# EAGLE board schematics (EAGLE 7.5.0)
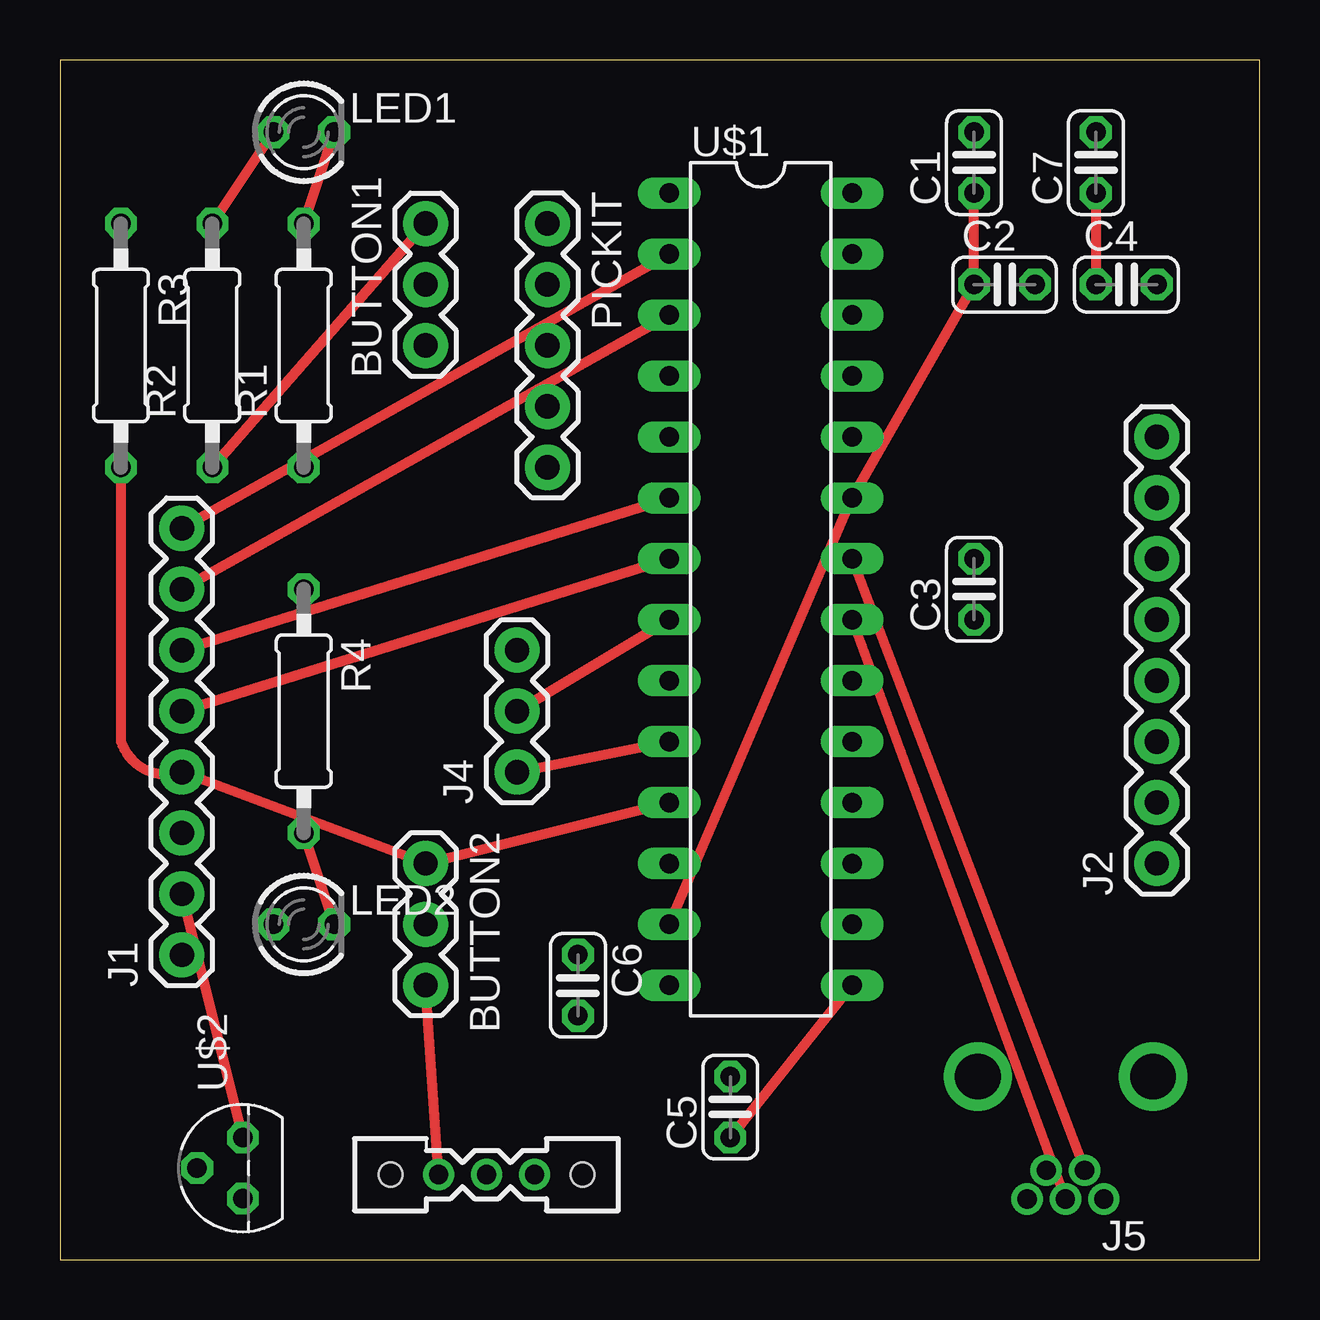
[diagram p0: board, top side]
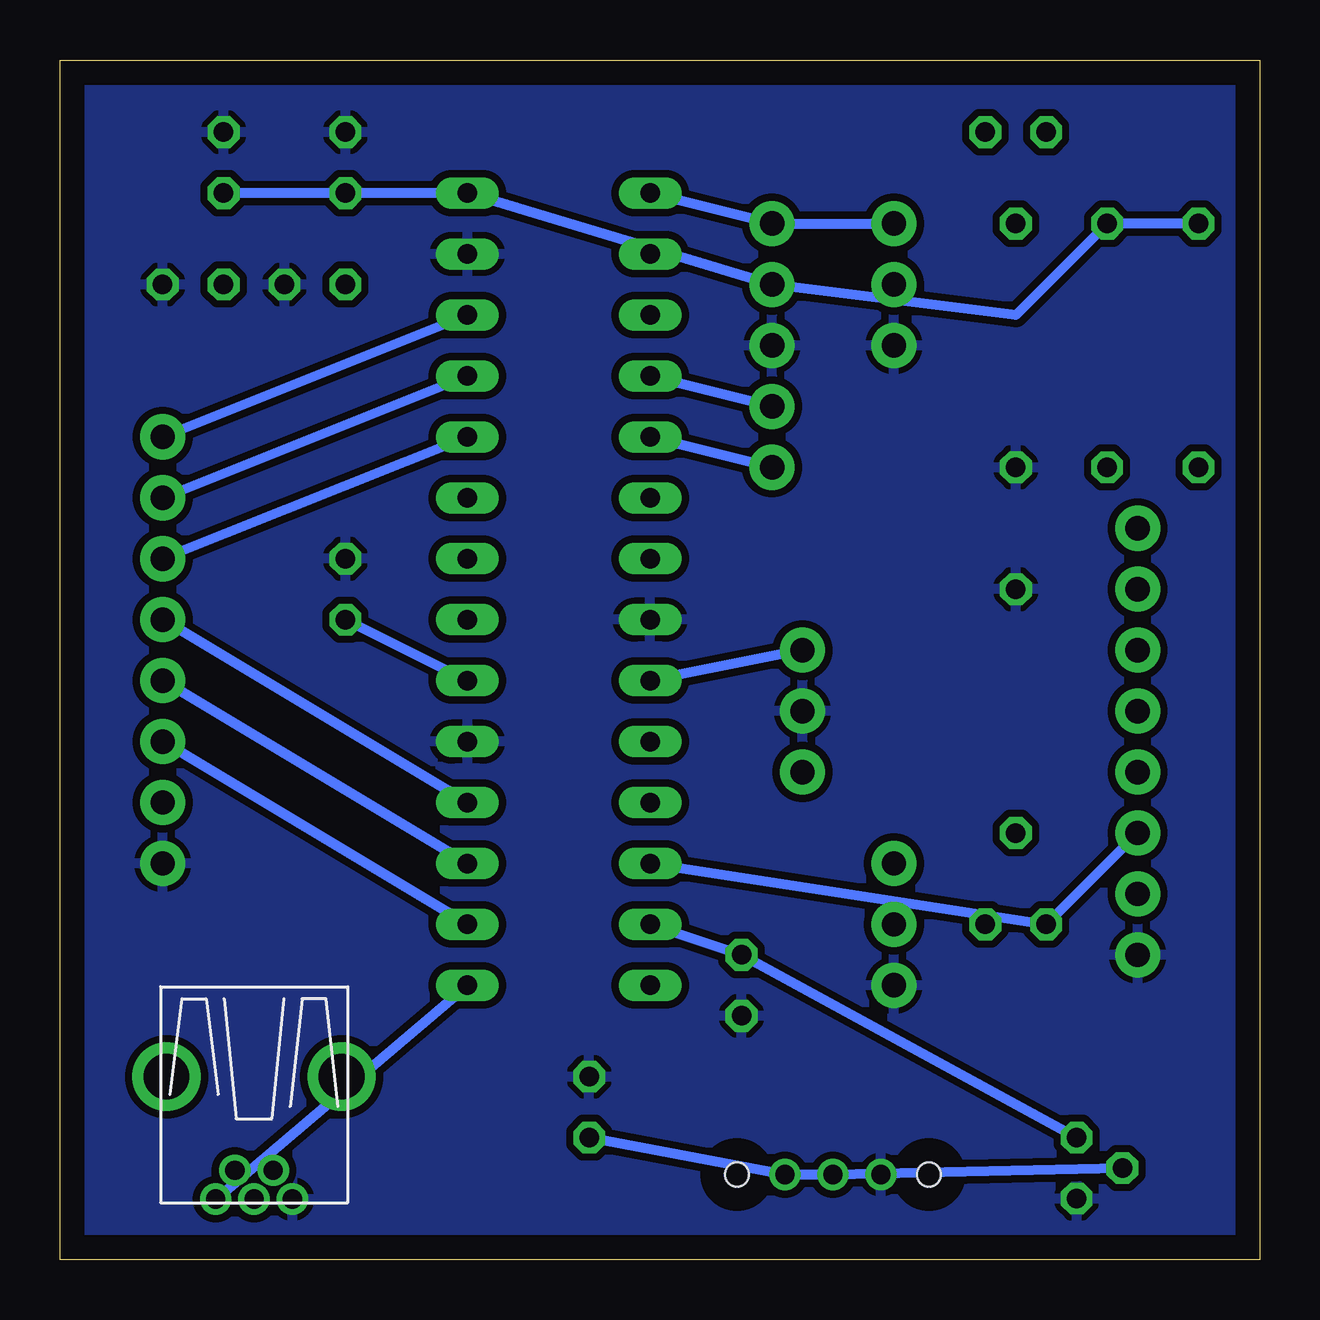
[diagram p1: board, bottom side, seen from below]

Size 50 x 50 mm. Coordinates in mm from the lower left corner, seen from the top.
Outline: 0,0 50,0 50,50 0,50 0,0
Copper layers (1*16): Top 0.035mm / dielectric 1.5mm / Bottom 0.035mm
Design rules "default": minimum track width 10mil, minimum drill 24mil, track to track 8mil, track to pad 8mil, pad to pad 8mil, via to via 8mil, smd to smd 8mil, copper to edge 40mil, drill to drill 8mil, minimum pad ring 10mil, minimum via ring 8mil, stop-mask expansion 4mil, vias tented up to drill 0mil, thermal gap 10mil

## Footprints (pad centres in the part's own frame; a part is rotated, then mirrored left to right if it is on the bottom)
1X03 = drill 1.016 pad 1.88: 1 0,0; 2 2.54,0; 3 5.08,0
C025-024X044 = drill 0.813 octagon: 1 -1.27,0; 2 1.27,0
1X08_ROUND = drill 1.016 pad 1.88: 1 0,0; 2 2.54,0; 3 5.08,0; 4 7.62,0; 5 10.16,0; 6 12.7,0; 7 15.24,0; 8 17.78,0
USB-MB-H = drill 0.8: D+ 5.1,0; D- 3.9,0.8; GND 5.1,-1.6; ID 3.9,-0.8; VBUS 5.1,1.6 | drill 1.9: P$6 0,-3.65; P$7 0,3.65
LED3MM = drill 0.813 octagon: A -1.27,0; K 1.27,0
1X05 = drill 1.016 pad 1.88: 1 0,0; 2 2.54,0; 3 5.08,0; 4 7.62,0; 5 10.16,0
0207/10 = drill 0.813 octagon: 1 -5.08,0; 2 5.08,0
DIL28-3 = drill 0.813 long: 1 -16.51,-3.81; 2 -13.97,-3.81; 3 -11.43,-3.81; 4 -8.89,-3.81; 5 -6.35,-3.81; 6 -3.81,-3.81; 7 -1.27,-3.81; 8 1.27,-3.81; 9 3.81,-3.81; 10 6.35,-3.81; 11 8.89,-3.81; 12 11.43,-3.81; 13 13.97,-3.81; 14 16.51,-3.81; 15 16.51,3.81; 16 13.97,3.81; 17 11.43,3.81; 18 8.89,3.81; 19 6.35,3.81; 20 3.81,3.81; 21 1.27,3.81; 22 -1.27,3.81; 23 -3.81,3.81; 24 -6.35,3.81; 25 -8.89,3.81; 26 -11.43,3.81; 27 -13.97,3.81; 28 -16.51,3.81
TO92 = drill 0.813 octagon: 1 -1.27,0; 2 0,1.905; 3 1.27,0
SWITCH = drill 0.8: 1.GND 1,2; 2.VIN 1,0; 3.VOUT 1,-2 | hole 1: 1,-4; 1,4

## Placement (x,y rotation side)
BUTTON1  [1X03]  15.24,38.1 90 top
BUTTON2  [1X03]  15.24,16.51 270 top
C1  0.1uF  [C025-024X044]  38.1,45.72 90 top
C2  0.1uF  [C025-024X044]  39.37,40.64 0 top
C3  10uF  [C025-024X044]  38.1,27.94 90 top
C4  0.1uF  [C025-024X044]  44.45,40.64 0 top
C5  1uF  [C025-024X044]  27.94,6.35 90 top
C6  10uF  [C025-024X044]  21.59,11.43 270 top
C7  0.1uF  [C025-024X044]  43.18,45.72 90 top
J1  [1X08_ROUND]  5.08,12.7 90 top
J2  [1X08_ROUND]  45.72,16.51 90 top
J4  [1X03]  19.05,20.32 90 top
J5  USB-MB-H  [USB-MB-H]  41.91,7.62 270 top
LED1  [LED3MM]  10.16,46.99 0 top
LED2  [LED3MM]  10.16,13.97 0 top
PICKIT  [1X05]  20.32,43.18 270 top
R1  330  [0207/10]  10.16,38.1 90 top
R2  10k  [0207/10]  6.35,38.1 90 top
R3  10k  [0207/10]  2.54,38.1 270 top
R4  330  [0207/10]  10.16,22.86 270 top
U$1  PIC32MX250F128B  [DIL28-3]  29.21,27.94 270 top
U$2  MCP1702  [TO92]  7.62,3.81 90 top
U$3  [SWITCH]  17.78,2.54 90 top

## Library data of the parts
BUTTON1 BUTTON2 C1-C7 J4 J5 PICKIT R2 R3 U$1-U$3 = libraries
J1 J2 = libraries; PROD_ID: CONN-08437
LED1 LED2 = led
R1 R4 = resistor

## Nets
+3V3: C1.1 C2.1 C4.1 C6.1 C7.1 J1.2 LED1.A PICKIT.2 R2.2 R3.1 U$1.13 U$1.23 U$1.28 U$2.3
+5V: J2.2
A0: J1.8 U$1.2
A1: J1.7 U$1.3
A4: J1.3 LED2.A U$1.12
B2: J1.6 U$1.6
B3: J1.5 U$1.7
B4: BUTTON2.1 J1.4 R3.2 U$1.11
B7: J2.3 U$1.16
B8: J2.4 U$1.17
B9: J2.5 U$1.18
B13: J2.6 U$1.24
B14: J2.7 U$1.25
B15: J2.8 U$1.26
D+: J5.D+ U$1.21
D-: J5.D- U$1.22
GND: BUTTON1.1 BUTTON2.3 C1.2 C2.2 C3.2 C4.2 C5.2 C6.2 C7.2 J1.1 J2.1 J4.2 J5.GND PICKIT.3 R1.1 R4.1 U$1.8 U$1.19 U$1.27 U$2.1 U$3.1.GND
MCLR: BUTTON1.3 PICKIT.1 R2.1 U$1.1
N$1: LED2.K R4.2
N$2: LED1.K R1.2
N$17: C3.1 U$1.20
N$29: U$1.14
OSC1: J4.3 U$1.9
OSC2: J4.1 U$1.10
PGC: PICKIT.5 U$1.5
PGD: PICKIT.4 U$1.4
VBUS: C5.1 J5.VBUS U$1.15 U$2.2 U$3.2.VIN U$3.3.VOUT

## Tracks (layer width: path | path; a pad name or v marks a point on that pad's centre or on a via)
+3V3
  Top 0.406: LED1.A R2.2 | U$1.13 U$1.23 C2.1 C1.1 | C7.1 C4.1 | J1.2 U$2.3
  Bottom 0.406: R3.1 R2.2 10.16,39.37 PICKIT.2 U$1.28 C1.1 C7.1 | U$1.13 C6.1 U$2.3
A0
  Top 0.406: J1.8 U$1.2
A1
  Top 0.406: J1.7 U$1.3
A4
  Bottom 0.406: J1.3 LED2.A U$1.12
B2
  Top 0.406: J1.6 U$1.6
B3
  Top 0.406: J1.5 U$1.7
B4
  Top 0.406: R3.2 2.54,21.59 arc90 J1.4 BUTTON2.1 U$1.11
B7
  Bottom 0.406: U$1.16 J2.3
B8
  Bottom 0.406: U$1.17 J2.4
B9
  Bottom 0.406: U$1.18 J2.5
B13
  Bottom 0.406: U$1.24 J2.6
B14
  Bottom 0.406: U$1.25 J2.7
B15
  Bottom 0.406: U$1.26 J2.8
D+
  Top 0.406: U$1.21 J5.D+
D-
  Top 0.406: U$1.22 J5.D-
GND
  Top 0.406: J4.2 U$1.8 | U$3.1.GND BUTTON2.3
  pour Bottom (isolate 0.305): 0,49.53 0,0 50.8,0 50.8,49.53 50.8,50.8 0,50.8
MCLR
  Top 0.406: R2.1 BUTTON1.3
  Bottom 0.406: BUTTON1.3 PICKIT.1 U$1.1
N$1
  Top 0.406: R4.2 LED2.K
N$2
  Top 0.406: LED1.K R1.2
N$17
  Bottom 0.406: C3.1 U$1.20
OSC1
  Bottom 0.406: J4.3 U$1.9
OSC2
  Top 0.406: J4.1 U$1.10
PGC
  Bottom 0.406: PICKIT.5 U$1.5
PGD
  Bottom 0.406: PICKIT.4 U$1.4
VBUS
  Top 0.406: C5.1 U$1.15
  Bottom 0.406: J5.VBUS U$1.15 | U$2.2 U$3.2.VIN U$3.3.VOUT C5.1